# Altium PCB Power Supply.PcbDoc
Units mm, origin at the board's own origin, x right, y up, seen from the top; angles counter-clockwise.
Board outline 75 x 40 mm, 2 copper layers (Top Layer, Bottom Layer), stack 1.671 mm thick; 32 components, 19 nets, 83 pads, 4 vias.
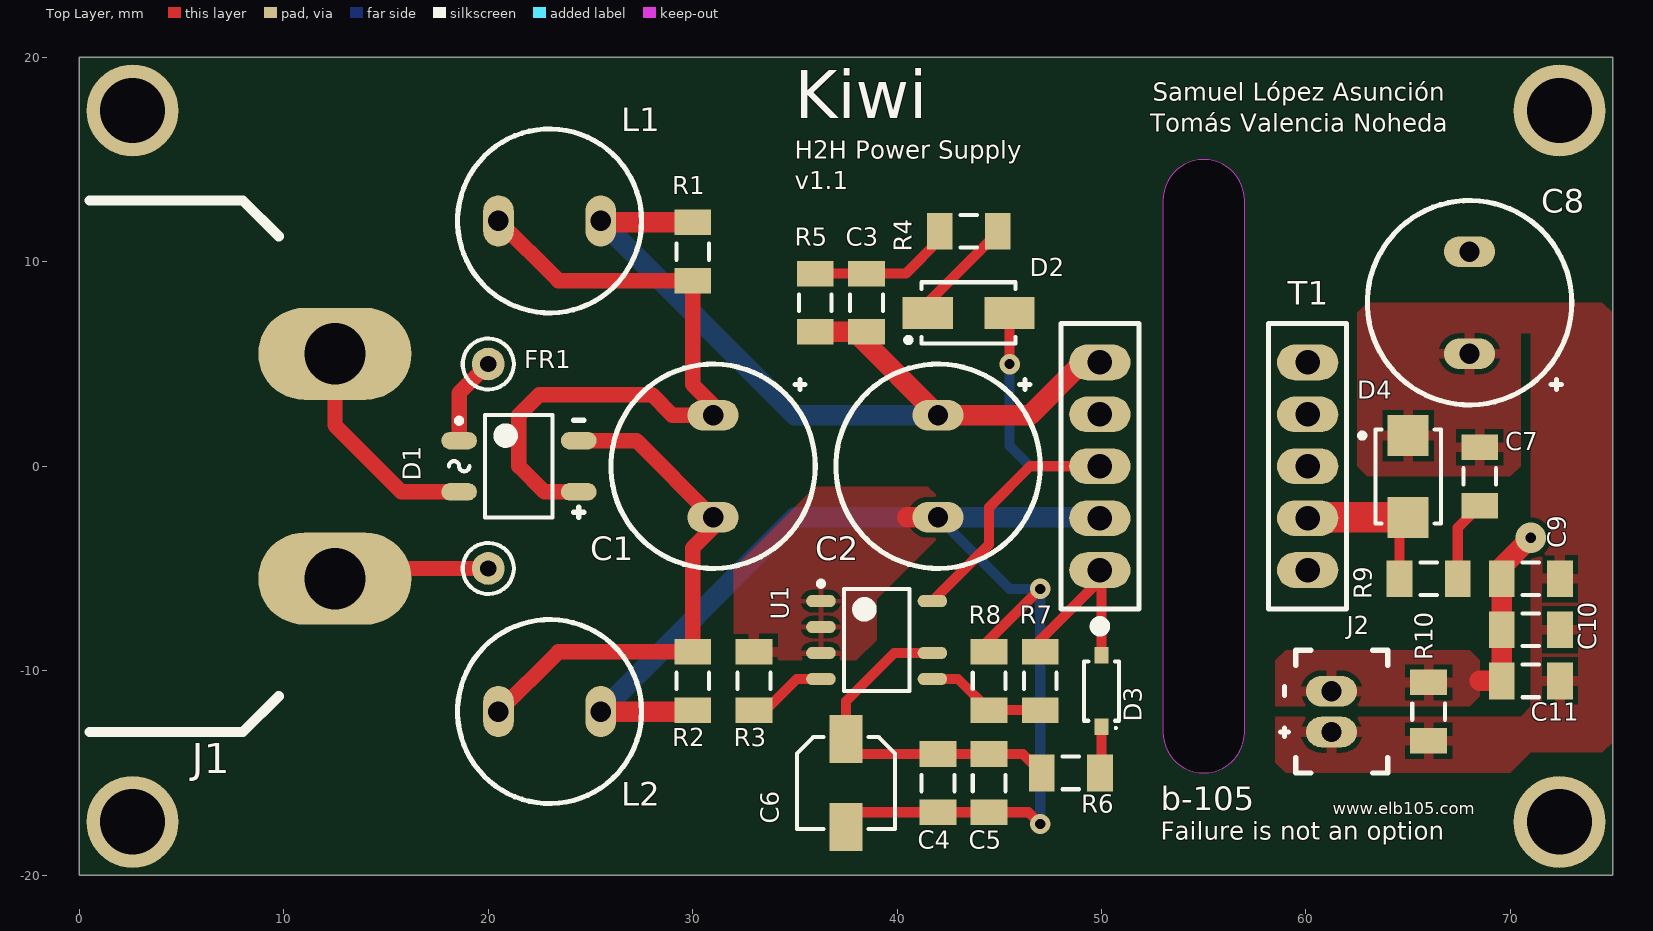
[diagram p0: Top Layer view]
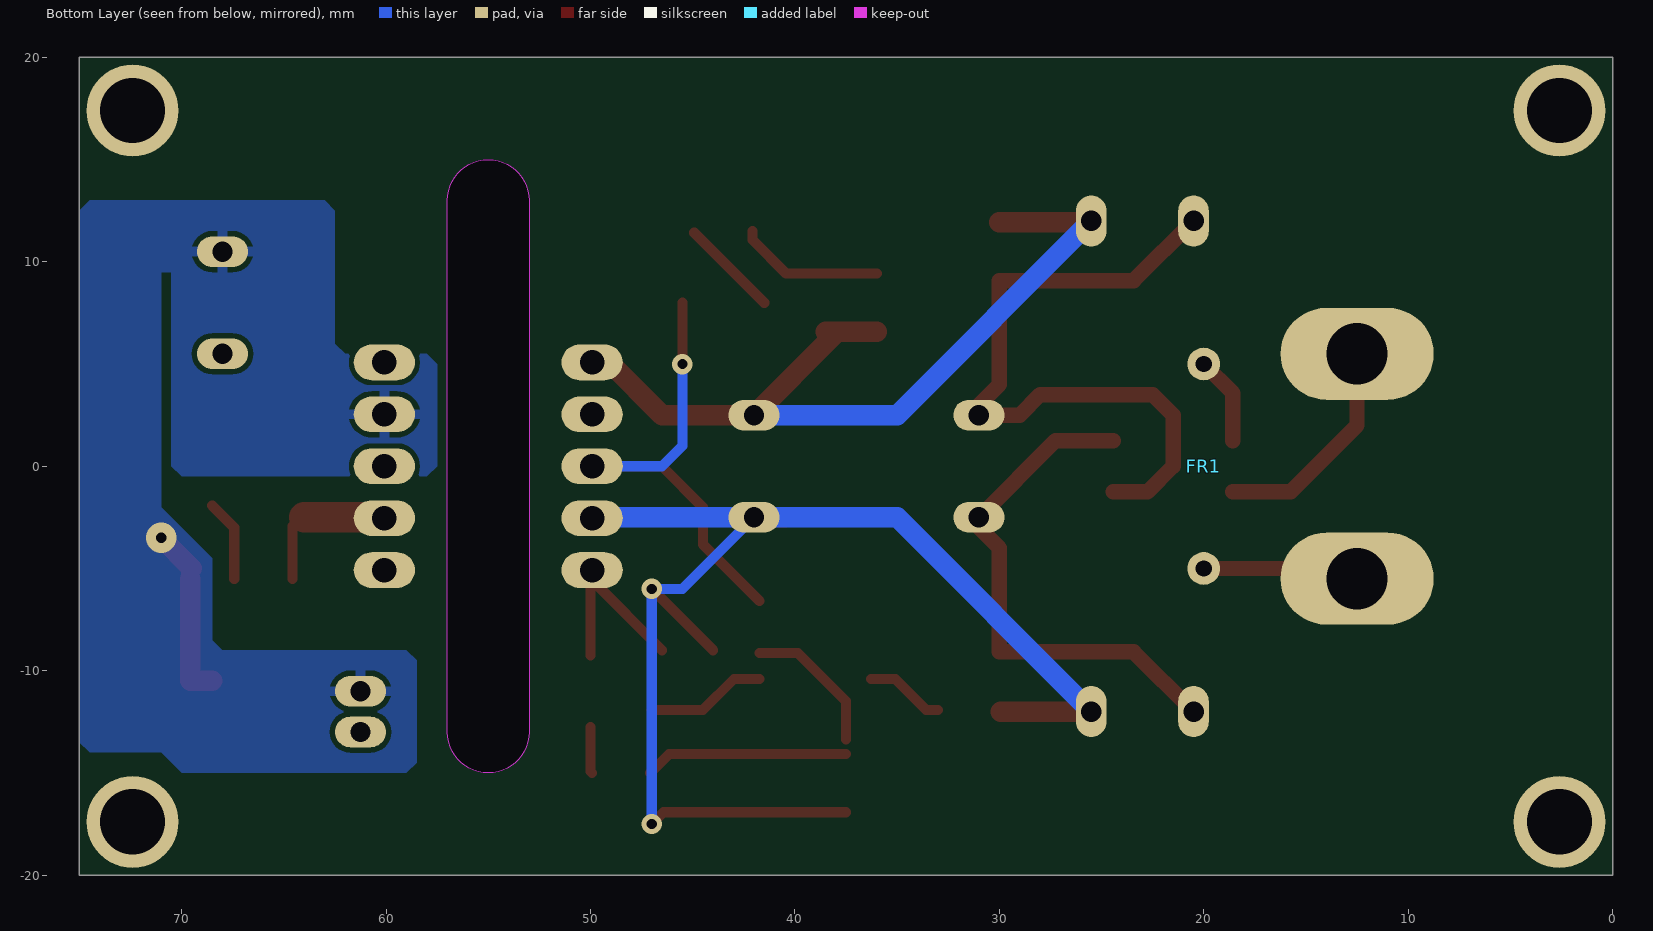
[diagram p1: Bottom Layer view, seen from below]

## Layer stack, top to bottom
Top Solder: solder mask 0.0102, Solder Resist, Dk 3.5
Top Layer: signal copper 0.0356
Dielectric 1: dielectric 1.6, FR-4, Dk 4.8
Bottom Layer: signal copper 0.0356
Bottom Solder: solder mask 0.0102, Solder Resist, Dk 3.5

## Board outline
0,-20 0,20 75,20 75,-20
cut-out: 53,-13 ccw(c55,-13) 55,-15 ccw(c55,-13) 57,-13 57,13 ccw(c55,13) 55,15 ccw(c55,13) 53,13

## Design rules (kind name [scope] priority, off if disabled: settings)
Clearance ClearancePriSide [InNetClass('Primary Side') vs InNetClass('Primary Side')] p1: gap=0.5
Clearance ClearancePolygonPriSide [InPolygon vs InNetClass('Primary Side')] p2: gap=0.5
Clearance [All] p3: gap=0.25
HoleSize [All] p1: absolutevalues=TRUE maxlimit=6.3 minlimit=0.3 maxpercent=80.000 minpercent=20.000
PolygonConnect PolygonConnectVia [IsVia] p1: connectstyle=Direct reliefconductorwidth=0.254 reliefentries=4 polygonreliefangle="90 Angle" airgapwidth=0.254
PolygonConnect PolygonConnectPriSideIC1 [(InComponent('U1') AND InNetClass('Primary Side'))] p2: connectstyle=Relief reliefconductorwidth=0.25 reliefentries=4 polygonreliefangle="90 Angle" airgapwidth=0.25
PolygonConnect [All] p3: connectstyle=Relief reliefconductorwidth=0.5 reliefentries=4 polygonreliefangle="90 Angle" airgapwidth=0.25
RoutingVias [All] p1: holewidth=0.5 width=0.8 viastyle="Through Hole" minholewidth=0.3 minwidth=0.6 maxholewidth=6.3 maxwidth=8
SilkToSolderMaskClearance [IsPad] p1: minsilkscreentomaskgap=0.15 clearancetoexposedcopper=TRUE
SolderMaskExpansion [All] p1: expansion=0.102
Width [All] p1: maxlimit=2.5 minlimit=0.25 preferedwidth=0.5
28 further rules are at their usual default settings.

## Classes and differential pairs
net class "Primary Side": AC_1 AC_2 AUX_OUT HVGND NetD1_1 NetD3_2 NetR3_1 NetT1_4 PRI_ALIM PRI_DRAIN RECT_+ RECT_- SNUBB_CAT SNUBB_DIV VDD VS

## Components (designator, comment, footprint, x,y, rotation, side; value= is the part's Value field where it differs from the comment)
C1 "6.8u" 450BXC6R8MEFC10X16 31,0 r270 top
C2 "6.8u" 450BXC6R8MEFC10X16 42,0 r270 top
C3 "680p" C1206 38.5,8 r90 top
C4 "1n" C1206 42,-15.5 r270 top
C5 "0.1u" C1206 44.5,-15.5 r270 top
C6 "4.7u" EXV475M035A9BAA 37.5,-15.5 r270 top
C7 "1n" C1206 68.5,-0.5 r90 top
C8 "1200u" EEUFM1A122 68,8 r90 top
C9 "0.1u" C1206 71,-5.5 r180 top
C10 "10n" C1206 71,-8 r180 top
C11 "1n" C1206 71,-10.5 r180 top
D1 "MB6S-E3/45" MB6S-E3/45 21.5,0 r0 top
D2 "US1M-13-F" US1M-13-F 43.5,7.5 r180 top
D3 "1N4148W-7-F" 1N4148W-7-F 50,-11 r270 top
D4 "B340LA-13-F" B340LA-13-F 65,-0.5 r90 top
FR1 "4.7" NFR25H0004708JA500 20,0 r90 bottom
J1 "JR-201S" JR-201S -6,0 r90 top
J2 "JST PH 2 Pin" B2B-PH-K-S 64,-12 r90 top
L1 "1m" DR0810-105L 23,12 r0 top
L2 "1m" DR0810-105L 23,-12 r0 top
R1 "6.8k" R1206 30,10.5 r90 top
R2 "6.8k" R1206 30,-10.5 r270 top
R3 "2k" R1206 33,-10.5 r90 top
R4 "0" R1206 43.5,11.5 r0 top
R5 "150k" R1206 36,8 r90 top
R6 "33" R1206 48.5,-15 r180 top
R7 "100k" R1206 47,-10.5 r270 top
R8 "33k" R1206 44.5,-10.5 r90 top
R9 "22" R1206 66,-5.5 r0 top
R10 "15k" R1206 66,-12 r90 top
T1 "WE7508110151" WE7508110151 55,0 r0 top
U1 "UCC28910" UCC28910 39,-8.5 r0 top

## Footprints (in the part's own frame and the unit in brackets; to place one, negate y for a bottom-side part, rotate by r counter-clockwise, add the part's x,y. Pads: shape width x height; smd on the part's side, far side on the other; paste and mask are expansions set on the pad)
1N4148W-7-F [mm] "Diode - Standard, Switch, 1.25V, 300mA, 100V"
  rect 0.8x0.7 smd: 1(-1.75,0) 2(1.75,0)
  silkscreen extent -1.45,-0.85 1.85,0.85, body extent -1.42,-0.85 1.43,0.85, height 1.45
450BXC6R8MEFC10X16 [mm] "Capacitor - Electrolytic Capacitor, 6.8 uF, 450 V, 20%, 10 mm"
  oval 1.5x2.5 hole 1: 1(-2.5,0) 2(2.5,0)
  silkscreen extent -5,-5 5,5, body extent -4.99,-5 5,5, height 17
B2B-PH-K-S [mm] "Conn - Battery, Male, 2 Pin, PCB"
  oval 1.5x2.5 hole 1: 1(-1,2.75) 2(1,2.75)
  silkscreen extent -3,0 3,5.25, body extent -3,0 3,4.5, height 6
B340LA-13-F [mm] "Diode - Schottky, 450mV, 3A, 40V"
  rect 2x2 smd: 1(-2,0) 2(2,0)
  silkscreen extent -2.3,-1.6 2.3,2.37, body extent -2.29,-1.46 2.28,1.46, height 2.2
C1206 [mm] "Chip Capacitor, 2-Leads, Body 3,20x1,60mm, IPC Medium Density"
  rect 1.25x1.8 smd: 1(-1.425,0) 2(1.425,0)
  silkscreen extent -0.4,-0.8 0.4,0.8, body extent -1.7,-0.9 1.7,0.9, height 0.7
DR0810-105L [mm] "Inductor - Power, 1 mH, 0.5 A Sat. Current, 10%"
  oval 1.5x2.5 hole 1: 1(-2.5,0) 2(2.5,0)
  silkscreen extent -4.5,-4.5 4.5,4.5, body extent -5.21,-5.24 5.25,5.24, height 12
EEUFM1A122 [mm] "Capacitor - Electrolytic Capacitor, 1200 uF, 10 V, 20%, 10 mm"
  oval 1.5x2.5 hole 1: 1(-2.5,0) 2(2.5,0)
  silkscreen extent -5,-5 5,5, body extent -4.99,-5 5,5, height 21
EXV475M035A9BAA [mm] "Capacitor - Electrolytic Capacitor, SMD, 4.7 uF, 35 V, 4 mm"
  rect 2.35x1.6 smd: 1(-2.15,0) 2(2.15,0)
  silkscreen extent -2.25,-2.4 2.25,2.4, body extent -2.25,-2.4 2.25,2.4, height 5.4
JR-201S [mm] "Conn - 250 V AC, Inlet, IEC, Plug"
  oval 4.5x7.5 hole 3: 1(-5.5,-18.5) 2(5.5,-18.5)
  silkscreen extent -13,-15.75 13,-6.5, body extent -14,-21 14,0, height 16
MB6S-E3/45 [mm] "Diode - Bridge Rectifier, 600 V, 0.5 A"
  oval 1.75x0.85 smd: 1(-2.925,1.25) 2(-2.925,-1.25) 3(2.925,-1.25) 4(2.925,1.25)
  silkscreen extent -3.42,-2.5 3.17,2.5, body extent -2.05,-2.5 2.05,2.5, height 2.9
NFR25H0004708JA500 [mm] "Resistor - Fusible, Non-flammable Resistor"
  round 1.6 hole 0.8: 1(-5,0) 2(5,0)
  body extent -5.25,-1.25 5.25,1.25, height 2.5
R1206 [mm] "Chip Resistor, 2-Leads, Body 3,20x1,60mm, IPC Medium Density"
  rect 1.25x1.8 smd: 1(-1.425,0) 2(1.425,0)
  silkscreen extent -0.4,-0.8 0.4,0.8, body extent -1.7,-0.9 1.7,0.9, height 0.7
UCC28910 [mm] "IC - SMPS Flyback, 700V Flyback Switcher with Constant-Voltage/Constant-Current and Primary-Side Control"
  oval 1.45x0.6 smd: 1(-2.725,1.905) 2(-2.725,0.635) 3(-2.725,-0.635) 4(-2.725,-1.905) 5(2.725,-1.905) 6(2.725,-0.635) 8(2.725,1.905)
  silkscreen extent -2.85,-2.5 1.6,2.88, body extent -2,-2.5 2,2.5, height 1.75
US1M-13-F [mm] "Diode - Ultra-fast, 75 ns, 1.7V, 1A, 1000V"
  rect 2.45x1.55 smd: 1(-2,0) 2(2,0)
  silkscreen extent -2.3,-1.5 3.07,1.5, body extent -2.3,-1.46 2.3,1.46, height 2.4
WE7508110151 [mm] "Transformer - Flyback/Offline Transformer"
  oval 3x1.75 hole 1.2: 1(-5.08,-5.08) 2(-5.08,-2.54) 3(-5.08,0) 4(-5.08,2.54) 5(-5.08,5.08) 6(5.08,5.08) 7(5.08,2.54) 8(5.08,0) 9(5.08,-2.54) 10(5.08,-5.08)
  silkscreen extent -6.98,-8.08 6.98,6.98, body extent -6.98,-6.98 6.98,6.98, height 12.7

## Part data
C1 C2: library part 450BXC6R8MEFC10X16, "Capacitor - Electrolytic Capacitor, 6.8 uF, 450 V, 20%, 10 mm"
C3 C4 C5 C7 C9 C10 C11: library part Capacitor, "Capacitor"
C6: library part EXV475M035A9BAA, "Capacitor - Electrolytic Capacitor, SMD, 4.7 uF, 35 V, 4 mm"
C8: library part EEUFM1A122, "Capacitor - Electrolytic Capacitor, 1200 uF, 10 V, 20%, 10 mm"
D1: "Diode - Bridge Rectifier, 600 V, 0.5 A"
D2: "Diode - Ultra-fast, 75 ns, 1.7V, 1A, 1000V"
D3: "Diode - Standard, Switch, 1.25V, 300mA, 100V"
D4: "Diode - Schottky, 450mV, 3A, 40V"
FR1: library part NFR25H0004708JA500, "Resistor - Fusible, Non-flammable Resistor"
J1: "Conn - 250 V AC, Inlet, IEC, Plug"
J2: library part B2B-PH-K-S, "Conn - Battery, Male, 2 Pin, PCB"
L1 L2: library part DR0810-105L, "Inductor - Power, 1 mH, 0.5 A Sat. Current, 10%"
R1 R2 R3 R4 R5 R6 R7 R8 R9 R10: library part Resistor, "Resistor"
T1: "Transformer - Flyback/Offline Transformer"
U1: "IC - SMPS Flyback, 700V Flyback Switcher with Constant-Voltage/Constant-Current and Primary-Side Control"

## Free pads (board coordinates)
  round 4.5 hole 3.2: ""(2.6,-17.4) ""(2.6,17.4) ""(72.4,-17.4) ""(72.4,17.4)

## Via types
v1: diameter 1, hole 0.5, Top Layer to Bottom Layer, 3 vias
v2: diameter 1.5, hole 0.5, Top Layer to Bottom Layer, tented both sides, 1 vias

## Nets (pads, with @x,y where several pads share a name; then routed paths per layer and width w, separated by ;. In a path a pad name is that pad's centre, name@x,y a point inside that pad or via, vN(x,y) a via of type N, cw(c..) or ccw(c..) an arc to the next point about the centre after c; other vN are vias at no path point)
5V: C7.2 C8.1 C9.1 C10.1 C11.1 D4.2 J2.1 R10.1
AC_1: FR1.1 J1.1 | length 7.7
  Top Layer w0.75: J1.1 13,-5 FR1.1
AC_2: D1.2 J1.2 | length 10.9
  Top Layer w0.75: J1.2 12.5,2 15.75,-1.25 D1.2
AUX_OUT: D3.1 R7.1 T1.1 | length 8.9
  Top Layer w0.5: R7.1@46.5,-9 T1.1@49.92,-5.58 ; D3.1 T1.1@50,-5.16
GND: C8.2 C9.2 C10.2 C11.2 J2.2 R10.2 T1.7 | length 8.9
  Top Layer w0.5: C9.2@69.5,-5 69.788,-5.288 C9.2
  Top Layer w1: 68.5,-10.5 C11.2 C10.2 C9.2 ; C9.2@69.5,-5 v2(71,-3.5)
HVGND: C2.2 C4.2 C5.2 C6.2 L2.2 R2.2 R3.2 R8.2 T1.2 U1.1 U1.2 U1.3 | length 66.2
  Top Layer w0.5: C6.2@37.5,-16.925 C4.2 C5.2 46.425,-16.925 v1(47,-17.5) ; R8.2@44,-9 v1(47,-6)
  Top Layer w1: L2.2 R2.2@29.925,-12 ; 40.5,-2.5 C2.2
  Bottom Layer w0.5: C2.2 45.5,-6 v1(47,-6) v1(47,-17.5)
  Bottom Layer w1: L2.2 35,-2.5 C2.2 T1.2@49.88,-2.5
NetD1_1: D1.1 FR1.2 | length 4.3
  Top Layer w0.75: D1.1 18.575,3.575 FR1.2
NetD3_2: D3.2 R6.1 | length 2.3
  Top Layer w0.5: R6.1 50,-14.925 D3.2
NetR3_1: R3.1 U1.4 | length 3.9
  Top Layer w0.5: R3.1 33.575,-11.925 35.095,-10.405 U1.4
PRI_ALIM: C2.1 C3.1 L1.2 R1.2 R5.1 T1.5 | length 41
  Top Layer w1: L1.2@25.575,11.925 R1.2 ; R5.1 C3.1 ; C3.1@38.125,6.375 C2.1 46.5,2.5 T1.5@49.08,5.08
  Bottom Layer w1: L1.2 35,2.5 C2.1
PRI_DRAIN: D2.1 T1.3 U1.8 | length 23.8
  Top Layer w0.5: U1.8 44.5,-3.82 44.5,-2 46.5,0 T1.3 ; v1(45.5,5) D2.1@45.5,8
  Bottom Layer w0.5: v1(45.5,5) 45.5,1 46.5,0 T1.3
RECT_+: C1.1 D1.3 L1.1 R1.1 | length 34
  Top Layer w0.75: L1.1 23.425,9.075 R1.1 30,4 31,3 C1.1 29,2.5 28,3.5 22.5,3.5 21.5,2.5 21.5,0 22.75,-1.25 D1.3
RECT_-: C1.2 D1.4 L2.1 R2.1 | length 25.8
  Top Layer w0.75: L2.1 23.425,-9.075 R2.1 30,-4 31,-3 C1.2 27.25,1.25 D1.4
SEC_OUT: D4.1 R9.1 T1.9 | length 6.5
  Top Layer w0.5: R9.1 D4.1@64.575,-2.925
  Top Layer w1.5: T1.9 60.08,-2.5 D4.1@64,-2.5
SEC_SNUBB: C7.1 R9.2 | length 4
  Top Layer w0.5: R9.2 67.425,-3 C7.1
SNUBB_CAT: D2.2 R4.2 | length 4.8
  Top Layer w0.5: D2.2@41.5,8 R4.2@44.925,11.425
SNUBB_DIV: C3.2 R4.1 R5.2 | length 7.2
  Top Layer w0.5: R5.2 C3.2 40.425,9.425 42.075,11.075 R4.1
VDD: C4.1 C5.1 C6.1 R6.2 U1.6 | length 17
  Top Layer w0.5: C6.1@37.5,-14.075 C4.1 C5.1 46.15,-14.075 R6.2 ; C6.1 37.5,-11.5 39.865,-9.135 U1.6
VS: R7.2 R8.1 U1.5 | length 5.9
  Top Layer w0.5: U1.5 42.98,-10.405 R8.1 R7.2
pads on no net: T1.4 T1.6 T1.8 T1.10

## Polygon pours and split planes (outlines as drawn)
GND on Bottom Layer "GND_BOT" (solid, pour order 2): 71,-14 70,-15 59,-15 58.5,-14.5 58.5,-9.5 59,-9 68,-9 68.5,-8.5 68.5,-4.5 71,-2 71,9.5 70.5,9.5 70.5,0 70,-0.5 58,-0.5 57.5,0 57.5,5 58,5.5 62,5.5 62.5,6 62.5,12.5 63,13 74.5,13 75,12.5 75,-13.5 74.5,-14
HVGND on Top Layer "HVGND" (solid, pour order 12): 38,-9.5 39,-8.5 39,-6.5 42,-3.5 42,-1.5 41.5,-1 36,-1 32,-5 32,-9.5 35.5,-9.5
GND on Top Layer "GND_TOP" (solid, pour order 11): 58.5,-11.75 58.5,-9.5 59,-9 68,-9 68.5,-9.5 68.5,-11.25 68,-11.75
5V on Top Layer "5V_TOP" (solid, pour order 4): 75,-13.5 75,7.5 74.5,8 66.5,8 66,8 63,8 62.5,7.5 62.5,0 63,-0.5 70,-0.5 70.5,0 70.5,6.5 71,6.5 71,-11.75 70.5,-12.25 58.5,-12.25 58.5,-14.5 59,-15 70,-15 71,-14 74.5,-14

## Silkscreen, mask and mechanical layers (free items; w line width, h text height)
Top Overlay:
  circle w0.2: c20,-5 r1.25
  circle w0.2: c20,5 r1.25
  text "Samuel López Asunción" at 52.502,17.573 h1.5
  text "Kiwi" at 35,16.25 h4
  text "Tomás Valencia Noheda" at 52.392,16.073 h1.5
  text "H2H Power Supply" at 35,14.75 h1.5
  text "v1.1" at 35,13.25 h1.5
  text "b-105" at 52.898,-17.224 h2
  text "www.elb105.com" at 61.32,-17.221 h1
  text "Failure is not an option" at 52.898,-18.572 h1.5
Mechanical 1:
  lines w0.25: 0,-20 0,20 75,20 75,-20 0,-20 ; 53,-13 ccw(c55,-13) 57,-13 57,0 57,13 ccw(c55,13) 53,13 53,0 53,-13